# EAGLE board CR1000X proto (EAGLE 9.6.2)
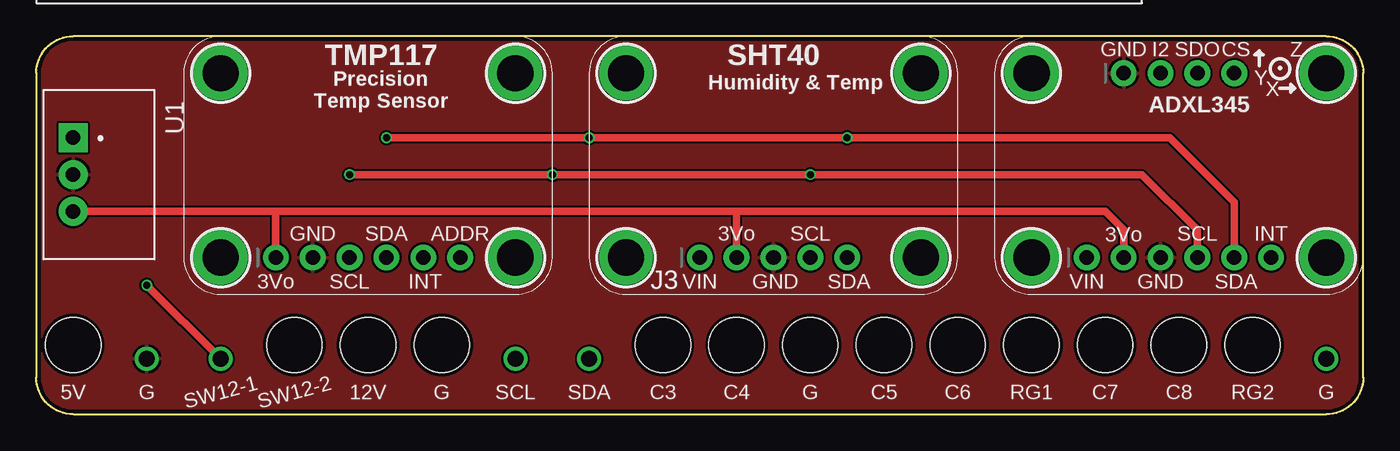
[diagram p0: board, top side]
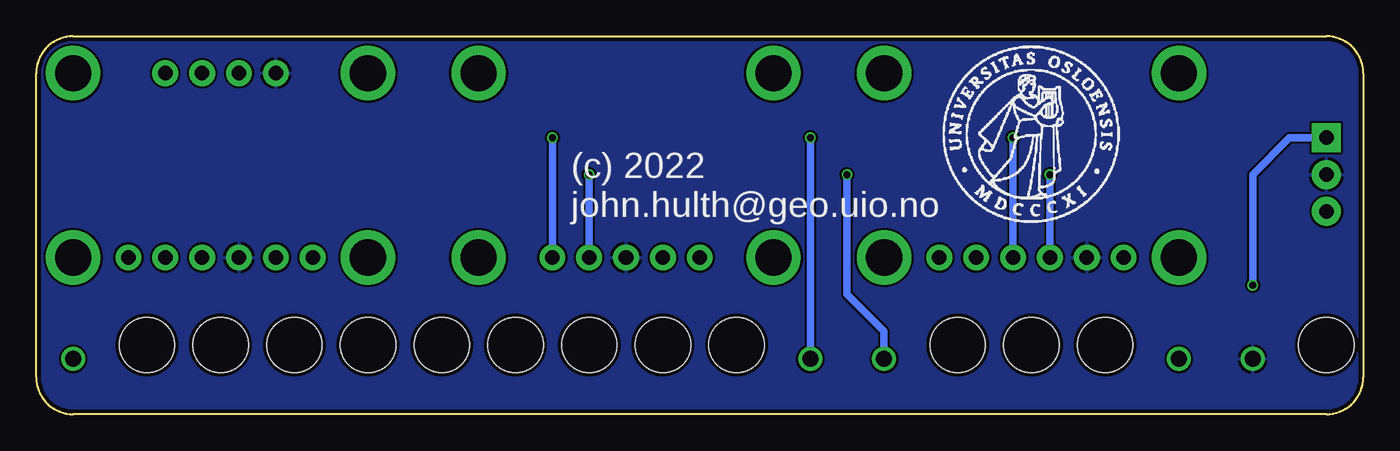
[diagram p1: board, bottom side, seen from below]

Size 91.44 x 26.04 mm. Coordinates in mm from the lower left corner, seen from the top.
Outline: 0,23.49 0,2.54 arc90 2.54,0 88.9,0 arc90 91.44,2.54 91.44,23.49 arc90 88.9,26.04 2.54,26.04 arc90 0,23.49
Copper layers (1*16): Top 0.018mm / dielectric 1.55mm / Bottom 0.018mm
Design rules "eC_2Layer_PClass6_BaseCopperO18_eCDefault": minimum track width 0.15mm, minimum drill 0.35mm, track to track 0.15mm, track to pad 0.15mm, pad to pad 0.15mm, via to via 0.15mm, smd to smd 0mil, copper to edge 0.25mm, drill to drill 0.35mm, minimum pad ring 0.175mm, minimum via ring 0.125mm, stop-mask expansion 0mil, vias tented up to drill 0.45mm, thermal gap 0.2mm
Net classes: 1 highpower: width 0.305 mm, drill 0.483 mm; 2 lowpower: width 0.254 mm, drill 0.483 mm
Holes 3.81 mm at 2.54,4.76 17.78,4.76 22.86,4.76 27.94,4.76 43.18,4.76 48.26,4.76 53.34,4.76 58.42,4.76 63.5,4.76 68.58,4.76 73.66,4.76 78.74,4.76 83.82,4.76

## Footprints (pad centres in the part's own frame; a part is rotated, then mirrored left to right if it is on the bottom)
691311500018 = drill 1.6: 1 -43.18,0; 2 -38.1,0; 3 -33.02,0; 4 -27.94,0; 5 -22.86,0; 6 -17.78,0; 7 -12.7,0; 8 -7.62,0; 9 -2.54,0; 10 2.54,0; 11 7.62,0; 12 12.7,0; 13 17.78,0; 14 22.86,0; 15 27.94,0; 16 33.02,0; 17 38.1,0; 18 43.18,0
691311500015 = drill 1.6: 1 -35.56,0; 2 -30.48,0; 3 -25.4,0; 4 -20.32,0; 5 -15.24,0; 6 -10.16,0; 7 -5.08,0; 8 0,0; 9 5.08,0; 10 10.16,0; 11 15.24,0; 12 20.32,0; 13 25.4,0; 14 30.48,0; 15 35.56,0
WURTH_ELEKTRONIK_ELECTROMECHANIC_TERMINAL_BLOCKS_CONNECTORS_REV19D_691311500018 = drill 1.1: 1 -43.18,0; 2 -38.1,0; 3 -33.02,0; 4 -27.94,0; 5 -22.86,0; 6 -17.78,0; 7 -12.7,0; 8 -7.62,0; 9 -2.54,0; 10 2.54,0; 11 7.62,0; 12 12.7,0; 13 17.78,0; 14 22.86,0; 15 27.94,0; 16 33.02,0; 17 38.1,0; 18 43.18,0
1X06_ROUND_70 = drill 1 pad 1.778: 1 -6.35,0; 2 -3.81,0; 3 -1.27,0; 4 1.27,0; 5 3.81,0; 6 6.35,0
1X05_ROUND_70 = drill 1 pad 1.778: 1 -5.08,0; 2 -2.54,0; 3 0,0; 4 2.54,0; 5 5.08,0
1X04_ROUND = drill 1 pad 1.778: 1 -3.81,0; 2 -1.27,0; 3 1.27,0; 4 3.81,0
173010535 = drill 1 pad 2 square: 1 -2.54,0 | drill 1 pad 2: 2 0,0; 3 2.54,0
MOUNTINGHOLE_2.5_PLATED = drill 2.5 pad 3.2: P$1 0,0

## Placement (x,y rotation side)
J1  [691311500018]  45.72,62.23 0 top  (outside the outline)
J2  [691311500015]  38.1,33.02 0 top  (outside the outline)
J3  [WURTH_ELEKTRONIK_ELECTROMECHANIC_TERMINAL_BLOCKS_CONNECTORS_REV19D_691311500018]  45.72,3.81 0 top
JP2  [1X06_ROUND_70]  22.86,10.79 0 top
JP4  [1X05_ROUND_70]  50.8,10.79 0 top
JP7  [1X06_ROUND_70]  78.74,10.79 0 top
JP8  [1X04_ROUND]  78.74,23.49 0 top
U1  173010535  [173010535]  2.54,16.51 270 top
U$3  MOUNTINGHOLE2.5  [MOUNTINGHOLE_2.5_PLATED]  12.7,23.49 0 top
U$4  MOUNTINGHOLE2.5  [MOUNTINGHOLE_2.5_PLATED]  33.02,23.49 0 top
U$6  MOUNTINGHOLE2.5  [MOUNTINGHOLE_2.5_PLATED]  12.7,10.79 0 top
U$7  MOUNTINGHOLE2.5  [MOUNTINGHOLE_2.5_PLATED]  33.02,10.79 0 top
U$9  [UIO-LOGO-BL]  29.21,12.95 0 bottom
U$22  MOUNTINGHOLE2.5  [MOUNTINGHOLE_2.5_PLATED]  40.64,23.49 0 top
U$23  MOUNTINGHOLE2.5  [MOUNTINGHOLE_2.5_PLATED]  60.96,23.49 0 top
U$25  MOUNTINGHOLE2.5  [MOUNTINGHOLE_2.5_PLATED]  40.64,10.79 0 top
U$26  MOUNTINGHOLE2.5  [MOUNTINGHOLE_2.5_PLATED]  60.96,10.79 0 top
U$36  MOUNTINGHOLE2.5  [MOUNTINGHOLE_2.5_PLATED]  68.58,23.49 0 top
U$37  MOUNTINGHOLE2.5  [MOUNTINGHOLE_2.5_PLATED]  88.9,23.49 0 top
U$39  MOUNTINGHOLE2.5  [MOUNTINGHOLE_2.5_PLATED]  68.58,10.79 0 top
U$40  MOUNTINGHOLE2.5  [MOUNTINGHOLE_2.5_PLATED]  88.9,10.79 0 top

## Library data of the parts
J1 J2 = Wurth_Elektronik_Electromechanic_Terminal_Blocks_Connectors_rev19d
J3 = CR1000X proto
JP2 JP4 JP7 JP8 = microbuilder
U1 = DC-DC Converter; CREATED_BY: PCBLayout.com; DIGIKEY_PARTNO: 732-173010535-ND; MANUFACTURER: Würth Elektronik; MPN: 173010535
U$3 U$4 U$6 U$7 U$22 U$23 U$25 U$26 = microbuilder; BOM: EXCLUDE
U$9 = UIO-John
U$36 U$37 U$39 U$40 = adafruit_electromech; BOM: EXCLUDE

## Nets
1H: J1.1
1L: J1.2
2H: J1.4
2L: J1.5
3.3V [lowpower]: JP2.1 JP4.2 JP7.2 U1.3
3H: J1.10
3L: J1.11
4H: J1.13
4L: J1.14
5H: J2.1
5L: J2.2
5V: J3.1
6H: J2.4
6L: J2.5
7H: J2.10
7L: J2.11
8H: J2.13
8L: J2.14
12V: J3.5
ADDR: JP2.6
C3: J3.9
C4: J3.10
C5: J3.12
C6: J3.13
C7: J3.15
C8: J3.16
CS: JP8.4
G2: J3.6
G3: J3.11
G4: J3.18
GND [highpower]: J3.2 JP2.2 JP4.3 JP7.3 JP8.1 U1.2
INT: JP2.5
INT1: JP7.6
INT2: JP8.2
P1: J1.16
P2: J1.18
RG1: J3.14
RG2: J3.17
SCL: J3.7 JP2.3 JP4.4 JP7.4
SDA: J3.8 JP2.4 JP4.5 JP7.5
SDO: JP8.3
SG1: J1.3
SG2: J1.6
SG3: J1.12
SG4: J1.15
SG5: J2.3
SG6: J2.6
SG7: J2.12
SG8: J2.15
SGP: J1.17
SGVX12: J1.9
SGVX34: J2.9
SW12-1: J3.3 U1.1
SW12-2: J3.4
VX1: J1.7
VX2: J1.8
VX3: J2.7
VX4: J2.8

## Tracks (layer width: path | path; a pad name or v marks a point on that pad's centre or on a via)
3.3V
  Top 0.508: 48.26,13.97 16.51,13.97 | 16.51,13.97 U1.3 | 48.26,13.97 73.66,13.97 74.93,12.7 JP7.2 | JP2.1 16.51,13.97 | JP4.2 48.26,13.97
GND
  pour Top: -0.63,26.67 92.08,26.67 92.08,-1.27 -0.63,-1.27
  pour Bottom: 0,26.04 91.44,26.04 91.44,-0.64 0,-0.64
SCL  (via drill 0.48)
  Top 0.508: JP7.4 80.01,12.7 76.2,16.51 v53.34,16.51 v35.56,16.51 v21.59,16.51
  Bottom 0.508: v21.59,16.51 JP2.3 | JP4.4 v53.34,16.51 | v35.56,16.51 35.56,8.26 33.02,5.71 J3.7
SDA  (via drill 0.48)
  Top 0.508: v24.13,19.05 v38.1,19.05 v55.88,19.05 78.11,19.05 82.55,14.61 JP7.5
  Bottom 0.508: JP2.4 v24.13,19.05 | JP4.5 v55.88,19.05 | J3.8 v38.1,19.05
SW12-1  (via drill 0.48)
  Top 0.508: v7.62,8.89 J3.3
  Bottom 0.508: v7.62,8.89 7.62,16.51 5.08,19.05 U1.1

## Text on the board
tPlace: TMP117 | SHT40 | GND | I2 | SDO | CS | Z | Precision / Temp Sensor | Humidity & Temp | Y | ADXL345 | X | GND | SDA | ADDR | 3Vo | SCL | 3Vo | SCL | INT | 3Vo | SCL | INT | VIN | GND | SDA | VIN | GND | SDA | 5V | G | SW12-1 | SW12-2 | 12V | G | SCL | SDA | C3 | C4 | G | C5 | C6 | RG1 | C7 | C8 | RG2 | G
bPlace: (c) 2022 / john.hulth@geo.uio.no